# EAGLE board Encoder (EAGLE 8.6.3)

Size 22 x 15 mm. Coordinates in mm from the lower left corner, seen from the top.
Outline: 22,1 22,14 arc90 21,15 1,15 arc90 0,14 0,12 0,1 arc90 1,0 3.06,0 arc41 3.72,0.25 arc-83 18.28,0.25 arc41 18.94,0 21,0 arc90 22,1
Copper layers (1*16): Top 0.035mm / dielectric 1.5mm / Bottom 0.035mm
Design rules "default": minimum track width 6mil, minimum drill 0.35mm, track to track 6mil, track to pad 6mil, pad to pad 6mil, via to via 6mil, smd to smd 6mil, copper to edge 40mil, drill to drill 6mil, minimum pad ring 10mil, minimum via ring 8mil, stop-mask expansion 4mil, vias tented up to drill 0mil, thermal gap 10mil
Holes 3.2 mm at 3,12 19,12

## Footprints (pad centres in the part's own frame; a part is rotated, then mirrored left to right if it is on the bottom)
0603-CAP = smd 1.1 x 1: 1 -0.85,0; 2 0.85,0
SOT23-W = smd 1.2 x 1.4: 1 -1.1,-1.3; 2 1.1,-1.3 | smd 1.8 x 1.2: 3 0,1.3
1X04 = drill 1.016 pad 1.88 square: 1 0,0 | drill 1.016 pad 1.88: 2 2.54,0; 3 5.08,0; 4 7.62,0
0603-RES = smd 1.1 x 1: 1 -0.85,0; 2 0.85,0

## Placement (x,y rotation side)
C1  0.1uF  [0603-CAP]  19.05,7.62 0 top
IC1  A1301LH  [SOT23-W]  3.43,3.94 37.5 top
IC2  A1301LH  [SOT23-W]  17.91,3.94 322.5 top
J1  [1X04]  6.99,8.26 0 top
R1  10K  [0603-RES]  8.26,5.08 180 top
R2  10K  [0603-RES]  12.7,5.08 180 top

## Library data of the parts
C1 = SparkFun-Capacitors
IC1 IC2 = allegro; MF: ALLEGRO MICROSYSTEMS, INC.; MPN: A1301ELHLT-T; OC_FARNELL: 1198084; OC_NEWARK: 31K6634
J1 = SparkFun-Connectors; PROD_ID: CONN-09696
R1 R2 = SparkFun-Resistors

## Nets
GND: C1.2 IC1.3 IC2.3 J1.1
OUTA: IC1.2 J1.3 R1.1
OUTB: IC2.2 J1.2 R2.1
VCC: C1.1 IC1.1 IC2.1 J1.4 R1.2 R2.2

## Tracks (layer width: path | path; a pad name or v marks a point on that pad's centre or on a via)
GND  (3 unrouted)
OUTA  (2 unrouted)
OUTB  (2 unrouted)
VCC  (5 unrouted)